# Altium PCB BugBuster_HAT.PcbDoc (part 3 of 3)
Units mm, origin at the board's own origin, x right, y up, seen from the top; angles counter-clockwise.
Board outline 110 x 80 mm, 4 copper layers (Top Layer, Mid Layer 1, Mid Layer 2, Bottom Layer), stack 1.17 mm thick; 116 components, 99 nets, 522 pads, 1540 vias.
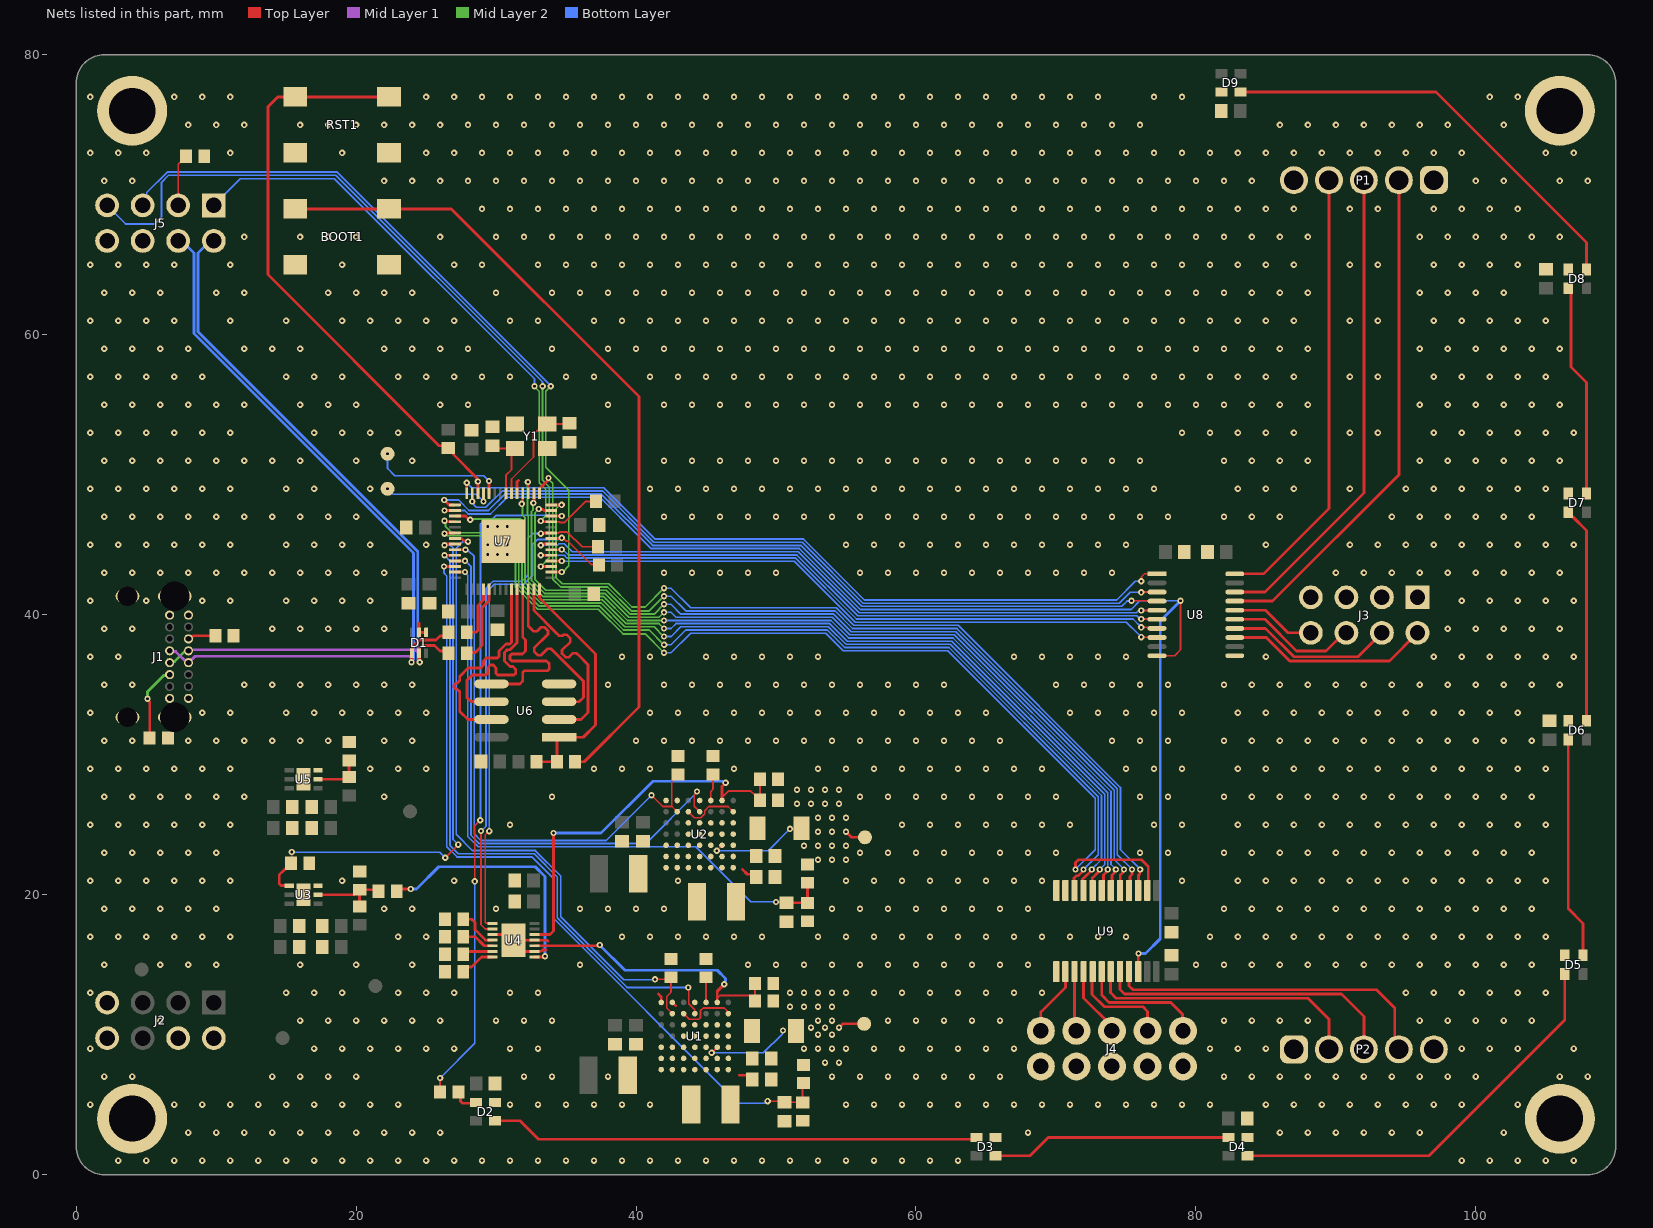
[diagram p4: the nets of this part, all layers, seen from the top]

## Via types
v1: diameter 0.45, hole 0.2, Top Layer to Bottom Layer, tented both sides, 1540 vias

## Nets (pads, with @x,y where several pads share a name; then routed paths per layer and width w, separated by ;. In a path a pad name is that pad's centre, name@x,y a point inside that pad or via, vN(x,y) a via of type N, cw(c..) or ccw(c..) an arc to the next point about the centre after c; other vN are vias at no path point) (continued)
GND: BOOT1.A1 BOOT1.A2 C1.1 C2.1 C3.1 C4.1 C5.1 C6.1 C7.1 C8.1 C9.1 C10.1 C11.1 C12.1 C13.1 C14.1 C15.1 C16.1 C17.1 C18.1 C19.1 C20.1 C21.1 C22.1 C23.1 C24.1 C25.1 C26.1 C27.1 C28.1 C29.1 C30.1 C31.1 C32.1 C33.1 C34.1 C35.1 C36.1 C37.1 C38.1 C39.1 C40.1 C41.1 C42.1 C43.1 C44.1 D1.4 D1.5 D2.2 D3.2 D4.2 D5.2 D6.2 D7.2 D8.2 D9.2 J1.1 J1.2 J1.3 J1.4 J1.A1 J1.A12 J1.B1 J1.B12 J2.7 J2.8 J3.1 J3.3 J3.5 J3.7 J4.6 J4.7 J4.8 J4.9 J4.10 J5.6 J5.8 P1.5 P2.5 pad.1 pad.2 pad.3 pad.4 R5.1 R6.1 R7.1 R8.1 R9.1 R10.1 R12.1 R14.1 R15.1 R16.2 R17.2 R18.1 R20.1 R25.2 R27.2 R33.1 R34.1 R35.1 RST1.A1 RST1.A2 U1.A1 U1.A2 U1.A3 U1.A7 U1.B1 U1.B2 U1.B3 U1.B7 U1.C1 U1.C2 U1.C3 U1.C4 U1.C5 U1.D1 U1.D2 U1.D3 U1.D4 U1.D5 U1.D7 U1.E1 U1.E2 U1.E3 U1.E4 U1.E5 U1.F1 U1.F2 U1.G1 U1.G2 U2.A1 U2.A2 U2.A3 U2.A7 U2.B1 U2.B2 U2.B3 U2.B7 U2.C1 U2.C2 U2.C3 U2.C4 U2.C5 U2.D1 U2.D2 U2.D3 U2.D4 U2.D5 U2.D7 U2.E1 U2.E2 U2.E3 U2.E4 U2.E5 U2.F1 U2.F2 U2.G1 U2.G2 U3.3 U3.7 U4.3 U4.9 U4.11 U4.15 U5.3 U5.7 U6.4 U7.19 U7.57 U8.11 U9.11 U9.12 U9.13 Y1.2 Y1.4 | length 12.2
  Top Layer w0.2: 24.5,39.4 D1.5@24.5,38.74 D1.4@25,38.74 ; U4.3@29.75,17.15 30.849,17.15 U4.15@31.249,16.75 ; U7.19@31.5,48.685 31.5,49.5 31.6,49.6 ; 33.57,16.052 33.313,16.052 33.212,15.952 32.749,15.952 U4.9@32.747,15.95 32,15.95 31.249,16.701 U4.15@31.249,16.75 ; 33.7,16.7 33.65,16.75 U4.11@32.747,16.75 U4.15@31.249,16.75 ; 41.6,12.9 41.8,12.7 U1.A7@41.8,12.3 ; U1.B7@42.6,12.3 42.831,12.069 ; 47.4,7.1 48,7.1 C7.1@48.3,6.8 ; 47.6,21.8 47.942,21.458 48.367,21.458 C11.1@48.575,21.25
  other v1: 3,1 5,1 7,1 9,1 11,1 13,1 15,1 17,1 19,1 21,1 23,1 25,1 27,1 29,1 31,1 33,1 35,1 37,1 39,1 41,1 43,1 45,1 47,1 49,1 51,1 53,1 55,1 57,1 59,1 61,1 63,1 99,1 101,1 103,1 105,1 107,1 8,3 10,3 12,3 14,3 16,3 18,3 20,3 22,3 24,3 26,3 68,3 86,3 88,3 90,3 92,3 94,3 96,3 102,3 1,5 7,5 9,5 11,5 13,5 15,5 17,5 19,5 21,5 23,5 31,5 33,5 35,5 37,5 39,5 41,5 55,5 57,5 59,5 61,5 63,5 65,5 67,5 69,5 71,5 73,5 75,5 77,5 79,5 81,5 85,5 87,5 89,5 91,5 93,5 95,5 97,5 99,5 103,5 2,7 4,7 14,7 16,7 18,7 20,7 32,7 34,7 38,7 54,7 56,7 58,7 60,7 62,7 64,7 66,7 82,7 84,7 86,7 88,7 90,7 92,7 94,7 96,7 98,7 100,7 106,7 108,7 1,9 17,9 19,9 21,9 23,9 25,9 27,9 31,9 33,9 55,9 57,9 59,9 61,9 63,9 65,9 67,9 81,9 83,9 85,9 99,9 101,9 103,9 107,9 6,11 16,11 18,11 20,11 22,11 24,11 26,11 30,11 32,11 34,11 58,11 60,11 62,11 64,11 66,11 82,11 84,11 86,11 88,11 96,11 98,11 100,11 102,11 104,11 1,13 15,13 17,13 19,13 23,13 25,13 27,13 31,13 33,13 55,13 57,13 59,13 61,13 63,13 65,13 67,13 69,13 95,13 97,13 99,13 101,13 103,13 105,13 2,15 6,15 8,15 10,15 16,15 20,15 24,15 36,15 48,15 50,15 52,15 54,15 56,15 58,15 60,15 62,15 64,15 66,15 68,15 80,15 82,15 84,15 86,15 88,15 90,15 92,15 94,15 96,15 98,15 100,15 102,15 104,15 1,17 3,17 5,17 7,17 9,17 11,17 23,17 25,17 39,17 41,17 43,17 45,17 47,17 49,17 53,17 55,17 57,17 59,17 61,17 63,17 65,17 67,17 69,17 71,17 73,17 75,17 81,17 83,17 85,17 87,17 89,17 91,17 93,17 95,17 97,17 99,17 101,17 103,17 105,17 2,19 4,19 6,19 8,19 10,19 22,19 24,19 30,19 36,19 38,19 40,19 42,19 54,19 56,19 58,19 60,19 62,19 64,19 66,19 68,19 82,19 84,19 86,19 88,19 90,19 92,19 94,19 96,19 98,19 100,19 102,19 104,19 1,21 3,21 5,21 7,21 9,21 11,21 19,21 27,21 43,21 55,21 57,21 59,21 61,21 63,21 65,21 67,21 69,21 79,21 83,21 85,21 87,21 89,21 91,21 93,21 95,21 97,21 99,21 101,21 103,21 105,21 2,23 4,23 6,23 8,23 10,23 56,23 58,23 60,23 62,23 64,23 66,23 68,23 70,23 76,23 78,23 82,23 84,23 86,23 88,23 90,23 92,23 94,23 96,23 98,23 100,23 102,23 104,23 1,25 3,25 5,25 7,25 9,25 11,25 31,25 59,25 61,25 63,25 65,25 67,25 69,25 71,25 77,25 79,25 83,25 85,25 87,25 89,25 91,25 93,25 95,25 97,25 99,25 101,25 103,25 105,25 2,27 4,27 6,27 8,27 10,27 12,27 22,27 34,27 56,27 58,27 60,27 62,27 64,27 66,27 68,27 70,27 76,27 78,27 82,27 84,27 86,27 88,27 90,27 92,27 94,27 96,27 98,27 100,27 102,27 104,27 1,29 3,29 5,29 7,29 9,29 11,29 21,29 23,29 25,29 37,29 39,29 41,29 47,29 53,29 55,29 57,29 59,29 61,29 63,29 65,29 67,29 69,29 75,29 77,29 79,29 83,29 85,29 87,29 89,29 91,29 93,29 95,29 97,29 99,29 101,29 103,29 105,29 2,31 4,31 8,31 10,31 12,31 14,31 16,31 18,31 22,31 24,31 40,31 42,31 44,31 46,31 48,31 50,31 52,31 54,31 56,31 58,31 60,31 62,31 64,31 66,31 74,31 76,31 78,31 82,31 84,31 86,31 88,31 90,31 92,31 94,31 96,31 98,31 100,31 102,31 104,31 1,33 9,33 11,33 15,33 17,33 19,33 21,33 23,33 25,33 41,33 43,33 45,33 47,33 49,33 51,33 53,33 55,33 57,33 59,33 61,33 63,33 65,33 71,33 73,33 75,33 77,33 79,33 83,33 85,33 87,33 89,33 91,33 93,33 95,33 97,33 99,33 101,33 103,33 2,35 4,35 12,35 14,35 16,35 18,35 20,35 22,35 24,35 38,35 42,35 44,35 46,35 48,35 50,35 52,35 54,35 56,35 58,35 60,35 62,35 70,35 72,35 74,35 76,35 78,35 82,35 84,35 86,35 88,35 90,35 92,35 94,35 96,35 98,35 100,35 102,35 104,35 106,35 1,37 3,37 39,37 41,37 45,37 47,37 49,37 51,37 53,37 67,37 69,37 71,37 73,37 75,37 85,37 97,37 99,37 101,37 103,37 105,37 107,37 2,39 4,39 14,39 16,39 18,39 20,39 22,39 98,39 100,39 102,39 104,39 106,39 1,41 5,41 9,41 11,41 15,41 17,41 19,41 21,41 99,41 101,41 103,41 105,41 107,41 2,43 4,43 6,43 8,43 10,43 12,43 14,43 16,43 18,43 20,43 22,43 42,43 44,43 46,43 48,43 50,43 56,43 58,43 60,43 62,43 64,43 66,43 68,43 70,43 72,43 74,43 90,43 92,43 94,43 96,43 98,43 100,43 102,43 104,43 106,43 29.4,44.3 30.1,44.3 30.8,44.3 1,45 3,45 5,45 7,45 9,45 11,45 15,45 17,45 19,45 21,45 25,45 29.4,45 30.1,45 30.8,45 55,45 57,45 59,45 61,45 63,45 65,45 67,45 69,45 71,45 73,45 75,45 85,45 91,45 93,45 95,45 97,45 99,45 101,45 103,45 105,45 107,45 29.4,46.3 30.1,46.3 30.8,46.3 2,47 4,47 6,47 8,47 10,47 12,47 14,47 16,47 18,47 20,47 42,47 44,47 46,47 48,47 50,47 52,47 54,47 56,47 58,47 60,47 62,47 64,47 66,47 68,47 70,47 72,47 74,47 76,47 78,47 82,47 84,47 86,47 94,47 96,47 98,47 100,47 102,47 104,47 1,49 3,49 5,49 7,49 9,49 11,49 15,49 17,49 21,49 41,49 43,49 45,49 47,49 49,49 51,49 53,49 55,49 57,49 59,49 61,49 63,49 65,49 67,49 69,49 71,49 73,49 75,49 77,49 83,49 85,49 87,49 91,49 95,49 97,49 99,49 101,49 103,49 105,49 2,51 4,51 6,51 8,51 10,51 12,51 14,51 16,51 20,51 24,51 38,51 42,51 44,51 46,51 48,51 50,51 52,51 54,51 56,51 58,51 60,51 62,51 64,51 66,51 68,51 70,51 72,51 74,51 76,51 82,51 84,51 86,51 88,51 96,51 98,51 100,51 102,51 104,51 106,51 1,53 3,53 5,53 7,53 9,53 11,53 17,53 19,53 21,53 23,53 79,53 81,53 83,53 85,53 87,53 91,53 93,53 97,53 99,53 101,53 103,53 105,53 107,53 2,55 4,55 6,55 8,55 10,55 12,55 16,55 18,55 20,55 26,55 28,55 38,55 42,55 44,55 46,55 48,55 50,55 52,55 54,55 56,55 58,55 60,55 62,55 64,55 66,55 68,55 70,55 72,55 74,55 76,55 78,55 80,55 82,55 84,55 86,55 88,55 96,55 98,55 100,55 102,55 104,55 106,55 1,57 3,57 5,57 7,57 9,57 15,57 17,57 19,57 23,57 25,57 27,57 29,57 31,57 35,57 37,57 41,57 43,57 45,57 47,57 49,57 51,57 53,57 55,57 57,57 59,57 61,57 63,57 65,57 67,57 69,57 71,57 73,57 75,57 77,57 79,57 81,57 83,57 85,57 87,57 91,57 93,57 97,57 99,57 101,57 103,57 105,57 2,59 4,59 6,59 8,59 12,59 14,59 16,59 22,59 24,59 26,59 28,59 34,59 38,59 40,59 42,59 44,59 46,59 48,59 50,59 52,59 54,59 56,59 58,59 60,59 62,59 64,59 66,59 68,59 70,59 72,59 74,59 76,59 78,59 80,59 82,59 84,59 86,59 88,59 96,59 98,59 100,59 102,59 104,59 106,59 1,61 3,61 5,61 7,61 11,61 15,61 19,61 21,61 23,61 25,61 27,61 31,61 33,61 37,61 39,61 41,61 43,61 45,61 47,61 49,61 51,61 53,61 55,61 57,61 59,61 61,61 63,61 65,61 67,61 69,61 71,61 73,61 75,61 77,61 79,61 81,61 83,61 85,61 87,61 91,61 93,61 97,61 99,61 101,61 103,61 105,61 2,63 4,63 6,63 10,63 12,63 18,63 20,63 22,63 24,63 30,63 34,63 36,63 38,63 40,63 42,63 44,63 46,63 48,63 50,63 52,63 54,63 56,63 58,63 60,63 62,63 64,63 66,63 68,63 70,63 72,63 74,63 76,63 78,63 80,63 82,63 84,63 86,63 88,63 96,63 98,63 100,63 102,63 1,65 3,65 5,65 7,65 11,65 19,65 27,65 29,65 33,65 35,65 37,65 39,65 41,65 43,65 45,65 47,65 49,65 51,65 53,65 55,65 57,65 59,65 61,65 63,65 65,65 67,65 69,65 71,65 73,65 75,65 77,65 79,65 81,65 83,65 85,65 87,65 91,65 93,65 97,65 99,65 101,65 103,65 12,67 16,67 18,67 20,67 26,67 30,67 32,67 34,67 36,67 38,67 40,67 42,67 44,67 46,67 48,67 50,67 52,67 54,67 56,67 58,67 60,67 62,67 64,67 66,67 68,67 70,67 72,67 74,67 76,67 78,67 80,67 82,67 84,67 86,67 88,67 96,67 98,67 100,67 102,67 104,67 106,67 29,69 31,69 33,69 35,69 37,69 39,69 41,69 43,69 45,69 47,69 49,69 51,69 53,69 55,69 57,69 59,69 61,69 63,69 65,69 67,69 69,69 71,69 73,69 75,69 77,69 79,69 81,69 83,69 85,69 87,69 91,69 93,69 97,69 99,69 101,69 103,69 2,71 4,71 22,71 24,71 26,71 28,71 30,71 32,71 34,71 36,71 38,71 40,71 42,71 44,71 46,71 48,71 50,71 52,71 54,71 56,71 58,71 60,71 62,71 64,71 66,71 68,71 70,71 72,71 74,71 76,71 78,71 80,71 82,71 84,71 100,71 102,71 106,71 108,71 1,73 3,73 5,73 11,73 19,73 25,73 27,73 29,73 31,73 33,73 35,73 37,73 39,73 41,73 43,73 45,73 47,73 49,73 51,73 53,73 55,73 57,73 59,73 61,73 63,73 65,73 67,73 69,73 71,73 73,73 75,73 77,73 79,73 81,73 83,73 85,73 87,73 89,73 91,73 93,73 95,73 97,73 99,73 105,73 107,73 8,75 10,75 12,75 16,75 18,75 20,75 22,75 24,75 26,75 28,75 30,75 32,75 34,75 36,75 38,75 40,75 42,75 44,75 46,75 48,75 50,75 52,75 54,75 56,75 58,75 60,75 62,75 64,75 66,75 68,75 70,75 72,75 74,75 76,75 86,75 88,75 90,75 92,75 94,75 96,75 98,75 102,75 1,77 7,77 9,77 11,77 25,77 27,77 29,77 31,77 33,77 35,77 37,77 39,77 41,77 43,77 45,77 47,77 49,77 51,77 53,77 55,77 57,77 59,77 61,77 63,77 65,77 67,77 69,77 71,77 73,77 77,77 79,77 101,77 103,77
ISN1: P2.1 R1.2 R3.2 R31.2 U1.F3 VADJ3.1 | length 8.4
  Top Layer w0.125: v1(45.4,8.7) U1.F3@45.8,9.1
  Top Layer w0.2: v1(54.5,10.5) 54.775,10.775 VADJ3.1@56.3,10.775
  Bottom Layer w0.125: v1(45.4,8.7) 49.1,8.7 50.438,10.038 50.438,10.238 v1(50.5,10.3)
  other v1: 53.5,8 54.5,8 52,9 53,9 54,9 53,10 54,10 52.5,10.5 53.5,10.5 53,11 54,11 51,12 52,12 53,12 54,12 51,13 52,13 53,13 54,13
ISN2: P1.1 R2.2 R4.2 R32.2 U2.F3 VADJ4.1 | length 8.8
  Top Layer w0.125: v1(45.768,23.135) 45.768,23.155 U2.F3@46.142,23.529 ; v1(51,24.7) 51.775,24.7 R2.2@51.825,24.75
  Top Layer w0.2: v1(55,24.5) 55.4,24.1 VADJ4.1@56.35,24.1
  Bottom Layer w0.125: v1(45.768,23.135) 49.435,23.135 v1(51,24.7)
  other v1: 53,22.5 54,22.5 55,22.5 52,23.5 53,23.5 54,23.5 55,23.5 53,24.5 54,24.5 53,25.5 54,25.5 55,25.5 51.5,26.5 52.5,26.5 53.5,26.5 54.5,26.5 51.5,27.5 52.5,27.5 53.5,27.5 54.5,27.5
ISP1: C7.2 C8.2 C9.2 R1.1 U1.F4 U1.F5 U1.G3 U1.G4 U1.G5
ISP2: C10.2 C11.2 C12.2 R2.1 U2.F4 U2.F5 U2.G3 U2.G4 U2.G5
LED_D: R36.2 U7.12 | length 48.6
  Top Layer w0.125: R36.2@26,5.9 v1(26,6.9) ; v1(28.475,20.95) 28.475,24.925 v1(28.862,25.312)
  Top Layer w0.2: U7.12@33.935,47.05 v1(34.691,47.05)
  Bottom Layer w0.125: v1(26,6.9) 28.475,9.375 v1(28.475,20.95) ; v1(28.862,25.312) 28.862,25.468 28.88,25.486 28.88,46.48 29.2,46.8 29.7,46.8 29.985,47.085 31.866,47.085 31.897,47.116 33.777,47.116 33.843,47.05 v1(34.691,47.05)
NetBOOT1_B1: BOOT1.B1 BOOT1.B2 R22.1 | length 58.5
  Top Layer w0.2: BOOT1.B2@15.65,69 BOOT1.B1@22.35,69 26.8,69 40.2,55.6 40.2,33.4 36.3,29.5 R22.1@35.65,29.5
NetC27_2: C27.2 U7.20 Y1.1 | length 7.8
  Top Layer w0.125: U7.20@31.1,48.685 31.1,49.7 32.669,51.269 32.669,52.894 32.938,53.162 33.188,53.162 Y1.1@33.65,53.625 35.2,53.625 C27.2@35.25,53.675
NetC33_2: C33.2 U7.21 Y1.3 | length 5.1
  Top Layer w0.125: C33.2@29.75,52.075 29.95,51.875 Y1.3@31.35,51.875 31.1,51.625 31.1,50.355 30.7,49.955 U7.21@30.7,48.685
NetC34_2: C34.2 R31.1 R33.2 U7.40 | length 57.5
  Top Layer w0.125: v1(49.4,5.25) 50.575,5.25 C34.2@50.625,5.2 ; C34.2@50.6,5.175 51.875,5.175 R33.2@51.9,5.15 51.9,6.486 R31.1@51.959,6.544
  Top Layer w0.2: v1(26.284,43.45) U7.40@27.065,43.45
  Bottom Layer w0.125: v1(26.284,43.45) 26.284,42.96 26.472,42.772 26.472,23.432 27.207,22.697 32.555,22.697 34.15,21.101 34.15,18.259 47.309,5.1 49.164,5.1 49.251,5.187 49.313,5.187 v1@49.325,5.175 ; v1(49.4,5.25) v1@49.325,5.175 ; v1@49.325,5.175 49.25,5.1 49.4,5.1 v1@49.325,5.175
NetC35_2: C35.2 R32.1 R34.2 U7.41 | length 47.4
  Top Layer w0.125: v1(50,19.475) 50.7,19.475 C35.2@50.75,19.425
  Top Layer w0.2: U7.41@27.065,43.05 27.608,43.05 v1(27.785,43.05) ; C35.2@50.75,19.425 52.225,19.425 R34.2@52.25,19.4 R32.1@52.25,20.85
  Bottom Layer w0.125: v1(27.785,43.05) 27.785,43.002 27.973,42.814 27.973,41.379 27.981,41.372 27.981,24.153 28.712,23.422 44.278,23.422 48.2,19.5 49.975,19.5 v1(50,19.475)
NetD2_1: D2.1 D3.3 | length 35
  Top Layer w0.2: D2.1@29.925,3.85 31.7,3.85 33.025,2.525 64.2,2.525 D3.3@64.325,2.65
NetD2_3: D2.3 R36.1 | length 1.9
  Top Layer w0.2: R36.1@27.3,5.9 27.458,5.742 27.458,5.242 27.6,5.1 28.525,5.1 D2.3@28.575,5.15
NetD3_1: D3.1 D4.3 | length 17.2
  Top Layer w0.2: D3.1@65.675,1.35 68.15,1.35 69.45,2.65 D4.3@82.325,2.65
NetD4_1: D4.1 D5.3 | length 30
  Top Layer w0.2: D4.1@83.675,1.35 96.65,1.35 106.35,11.05 D5.3@106.35,14.325
NetD5_1: D5.1 D6.3 | length 15.8
  Top Layer w0.2: D6.3@106.6,31.075 106.6,19 107.65,17.95 D5.1@107.65,15.675
NetD6_1: D6.1 D7.3 | length 15.5
  Top Layer w0.2: D7.3@106.6,47.325 106.6,47.225 106.825,47 106.925,47 107.9,46.025 D6.1@107.9,32.425
NetD7_1: D7.1 D8.3 | length 15.2
  Top Layer w0.2: D8.3@106.6,63.325 106.8,63.125 106.8,57.7 107.9,56.6 D7.1@107.9,48.675
NetD8_1: D8.1 D9.3 | length 31.1
  Top Layer w0.2: D9.3@83.175,77.35 97.15,77.35 107.9,66.6 D8.1@107.9,64.675
NetJ1_A5: J1.A5 R25.1 | length 2
  Top Layer w0.2: J1.A5@8.025,38.275 8.142,38.275 8.367,38.5 R25.1@9.95,38.5
NetJ1_B5: J1.B5 R27.1 | length 5.4
  Top Layer w0.2: v1(5.1,34) 5.1,33.932 5.25,33.782 R27.1@5.25,31.2
  Mid Layer 2 w0.2: v1(5.1,34) 5.1,34.5 6.258,35.658 6.608,35.658 J1.B5@6.675,35.725
NetJ3_2: J3.2 U8.13 | length 14.6
  Top Layer w0.2: U8.13@82.775,38.375 85.025,38.375 86.702,36.698 93.818,36.698 J3.2@95.83,38.71
NetJ3_4: J3.4 U8.14 | length 12.1
  Top Layer w0.2: U8.14@82.775,39.025 84.975,39.025 87,37 91.58,37 J3.4@93.29,38.71
NetJ3_6: J3.6 U8.15 | length 9.5
  Top Layer w0.2: U8.15@82.775,39.675 84.925,39.675 87.2,37.4 89.3,37.4 90.61,38.71 J3.6@90.75,38.71
NetJ3_8: J3.8 U8.16 | length 6.1
  Top Layer w0.2: U8.16@82.775,40.325 84.975,40.325 86.59,38.71 J3.8@88.21,38.71
NetJ4_1: J4.1 U9.14 | length 5
  Top Layer w0.2: J4.1@68.92,10.27 68.92,11.62 70.675,13.375 U9.14@70.675,14.5
NetJ4_2: J4.2 U9.15 | length 4.3
  Top Layer w0.2: U9.15@71.325,14.5 71.325,10.405 J4.2@71.46,10.27
NetJ4_3: J4.3 U9.16 | length 5.1
  Top Layer w0.2: U9.16@71.975,14.5 71.975,12.625 74,10.6 J4.3@74,10.27
NetJ4_4: J4.4 U9.17 | length 7.5
  Top Layer w0.2: U9.17@72.625,14.5 72.581,14.456 72.581,12.875 73.456,12 76.1,12 76.102,11.998 76.202,11.998 76.54,11.66 J4.4@76.54,10.27
NetJ4_5: J4.5 U9.18 | length 9.2
  Top Layer w0.2: U9.18@73.275,14.5 73.275,12.825 73.798,12.302 76.225,12.302 76.227,12.3 77.9,12.3 77.902,12.298 78.202,12.298 79.047,11.453 79.047,10.303 J4.5@79.08,10.27
NetJ5_1: J5.1 R30.2 U7.11 | length 45.1
  Top Layer w0.125: U7.11@33.935,46.65 33.937,46.648 34.507,46.648 34.555,46.6 34.9,46.6 36.4,48.1 R30.2@37.15,48.1
  Top Layer w0.2: v1(33.188,46.702) 33.256,46.702 33.308,46.65 U7.11@33.935,46.65
  Mid Layer 2 w0.125: v1(32.746,56.328) 32.746,56.279 33.075,55.95 33.075,49.425 33.55,48.95 33.55,47.064 v1(33.188,46.702)
  Bottom Layer w0.125: J5.1@9.685,69.105 11.73,71.15 18.45,71.15 32.746,56.854 v1(32.746,56.328)
NetJ5_3: J5.3 R35.2 | length 3.8
  Top Layer w0.125: J5.3@7.29,69.25 7.29,72.19 7.438,72.338 7.488,72.338 7.85,72.7 R35.2@7.85,72.75
NetP1_2: P1.2 U8.17 | length 36.5
  Top Layer w0.2: U8.17@82.775,40.975 85.475,40.975 94.5,50 P1.2@94.5,71.05
NetP1_3: P1.3 U8.18 | length 34.5
  Top Layer w0.2: U8.18@82.775,41.625 84.925,41.625 92,48.7 P1.3@92,71.05
NetP1_4: P1.4 U8.20 | length 32.1
  Top Layer w0.2: U8.20@82.775,42.925 84.825,42.925 89.5,47.6 P1.4@89.5,71.05
NetP2_2: P2.2 U9.19 | length 20
  Top Layer w0.2: U9.19@73.925,14.5 73.9,14.475 73.9,13 74.297,12.603 76.35,12.603 76.351,12.602 78.025,12.602 78.027,12.6 88,12.6 89.5,11.1 P2.2@89.5,8.95
NetP2_3: P2.3 U9.20 | length 21.8
  Top Layer w0.2: U9.20@74.575,14.5 74.575,13.225 74.895,12.905 76.475,12.905 76.476,12.903 78.15,12.903 78.151,12.902 90.398,12.902 92,11.3 P2.3@92,8.95
NetP2_4: P2.4 U9.21 | length 23.7
  Top Layer w0.2: U9.21@75.225,14.5 75.225,13.481 75.5,13.206 76.6,13.206 76.601,13.205 78.275,13.205 78.276,13.203 92.897,13.203 94.206,11.894 94.206,9.244 P2.4@94.5,8.95
NetR3_1: R3.1 R5.2 U1.F7 U4.10 | length 20.8
  Top Layer w0.125: 45.8,12.6 46,12.8 48.137,12.8 48.5,12.438 R3.1@48.5,12.4 R5.2@48.5,13.65
  Top Layer w0.2: U4.10@32.747,16.35 32.749,16.352 33.186,16.352 33.188,16.354 33.695,16.354 33.699,16.35 37.282,16.35 37.332,16.4 v1(37.4,16.4) ; U1.F7@45.8,12.3 45.8,13.1 v1(46.3,13.6)
  Bottom Layer w0.2: v1(37.4,16.4) 39.2,14.6 45.8,14.6 46.4,14 46.4,13.842 46.348,13.79 46.348,13.648 v1(46.3,13.6)
NetR4_1: R4.1 R6.2 U2.F7 U4.12 | length 28.6
  Top Layer w0.125: U2.F7@46.142,26.729 46.185,26.771 46.185,26.985 46.6,27.4 48.2,27.4 48.438,27.162 48.488,27.162 R4.1@48.85,26.8 ; R4.1@48.85,26.75 R4.1@48.85,26.8 ; R6.2@48.85,28.25 R4.1@48.85,26.8
  Top Layer w0.2: U4.12@32.747,17.15 33.85,17.15 34.1,17.4 v1(34.1,24.4) ; U2.F7@46.142,26.729 46.142,27.742 v1(46.4,28)
  Bottom Layer w0.2: v1(34.1,24.4) 37.5,24.4 41.2,28.1 46.158,28.1 46.21,28.048 46.352,28.048 v1(46.4,28)
NetR7_2: R7.2 U1.B6 U7.35 | length 46.8
  Top Layer w0.125: v1(41.35,13.95) 42.35,13.95 R7.2@42.5,14.1 42.5,13.025 42.2,12.725 42.2,11.9 U1.B6@42.6,11.5
  Top Layer w0.2: U7.35@27.065,45.45 27.53,45.45 27.707,45.273 27.883,45.273 27.932,45.223 v1(28,45.223)
  Bottom Layer w0.125: v1(28,45.223) 27.623,45.223 27.152,44.752 27.152,24.31 28.311,23.15 32.809,23.15 34.625,21.334 34.625,18.425 39.125,13.925 41.325,13.925 v1(41.35,13.95)
NetR8_2: R8.2 U2.B6 U7.37 | length 40.4
  Top Layer w0.125: v1(41.1,27.1) 41.9,26.3 42.571,26.3 ; U2.B6@42.942,25.929 42.571,26.3 ; R8.2@43,28.6 42.95,28.6 42.588,28.238 42.588,28.188 42.55,28.15 42.55,26.321 42.571,26.3
  Top Layer w0.2: U7.37@27.065,44.65 27.808,44.65 v1(27.812,44.647)
  Bottom Layer w0.125: v1(27.812,44.647) 27.874,44.584 28.016,44.584 28.427,44.173 28.427,41.567 28.434,41.559 28.434,24.341 28.9,23.875 37.875,23.875 v1(41.1,27.1)
NetR9_2: R9.2 U1.E7 | length 1.8
  Top Layer w0.125: U1.E7@45,12.3 R9.2@45,14.1
NetR10_2: R10.2 U2.E7 | length 1.9
  Top Layer w0.125: U2.E7@45.342,26.729 45.342,27.367 45.5,27.525 R10.2@45.5,28.6
NetR11_1: R11.1 R13.1 R15.2 U3.2 | length 5.7
  Top Layer w0.2: U3.2@17.275,20 19.85,20 20.2,20.35 R15.2@20.25,20.35 ; R11.1@20.25,19.15 R15.2@20.25,20.35 ; R13.1@21.6,20.25 21.5,20.35 R15.2@20.25,20.35
NetR12_2: R12.2 U3.4 U7.36 | length 38.7
  Top Layer w0.125: R12.2@15.35,22.25 15.4,22.3 v1(15.4,23.05) ; v1@26.35,22.625 v1(26.362,22.638) v1(27.3,23.575)
  Top Layer w0.2: U3.4@15.225,20.65 14.65,20.65 14.5,20.8 14.5,21.4 14.975,21.875 15.025,21.875 15.35,22.2 R12.2@15.35,22.25 ; v1(26.318,44.968) 26.386,44.968 26.468,45.05 U7.36@27.065,45.05
  Bottom Layer w0.125: v1(15.4,23.05) 15.411,23.039 25.961,23.039 v1@26.358,22.642 ; v1(26.318,44.968) 26.732,44.968 26.923,44.777 26.923,44.656 26.925,44.655 26.925,23.95 v1(27.3,23.575)
NetR13_2: R13.2 U4.8 | length 18.1
  Top Layer w0.2: R13.2@22.9,20.25 23.05,20.4 v1(23.9,20.4) ; U4.8@32.747,15.55 33.382,15.55 33.432,15.6 v1(33.5,15.6)
  Bottom Layer w0.2: v1(23.9,20.4) 24.3,20.4 25.9,22 32.8,22 33.5,21.3 v1(33.5,15.6)
NetR14_2: R14.2 U4.7 | length 2.5
  Top Layer w0.2: R14.2@27.65,14.5 27.65,14.512 27.975,14.837 28.237,14.837 28.95,15.55 U4.7@29.75,15.55
NetR16_1: R16.1 U4.6 | length 2.2
  Top Layer w0.2: R16.1@27.65,15.75 27.85,15.95 U4.6@29.75,15.95
NetR17_1: R17.1 U4.5 | length 2.4
  Top Layer w0.2: R17.1@27.65,17 28.5,17 29.15,16.35 U4.5@29.75,16.35
NetR18_2: R18.2 U4.4 | length 3
  Top Layer w0.2: R18.2@27.65,18.25 27.658,18.242 28.258,18.242 28.5,18 28.5,17.5 29.25,16.75 U4.4@29.75,16.75
NetR19_1: R19.1 R20.2 U5.2 | length 3.5
  Top Layer w0.2: U5.2@17.275,28.25 19.35,28.25 R19.1@19.5,28.4 R20.2@19.5,29.6
NetR21_2: R21.2 RST1.B1 RST1.B2 U7.26 | length 43.1
  Top Layer w0.2: RST1.B1@22.35,77 RST1.B2@15.65,77 14.4,77 13.7,76.3 13.7,64.3 25.926,52.074 26.427,52.074 R21.2@26.584,51.918 26.634,51.918 26.959,51.593 26.959,51.441 28.652,49.748 28.652,49.573 v1(28.7,49.525) U7.26@28.7,48.685
NetR23_2: R23.2 U7.47 | length 5.5
  Top Layer w0.2: R23.2@27.9,37.25 27.958,37.308 28.508,37.308 29,37.8 29,40.5 29.5,41 U7.47@29.5,41.815
NetR24_2: R24.2 U7.46 | length 3.9
  Top Layer w0.2: R24.2@27.9,38.75 28.555,38.75 28.698,38.893 28.698,40.672 29.1,41.073 U7.46@29.1,41.815
NetSWCLK_1: SWCLK.1 U7.24 | length 9.5
  Top Layer w0.2: U7.24@29.5,48.685 v1(29.5,49.55)
  Bottom Layer w0.125: v1(22.25,51.5) 22.25,50.45 22.761,49.939 29.111,49.939 v1(29.5,49.55)
NetSWD_1: SWD.1 U7.25 | length 7.8
  Top Layer w0.2: v1(29.1,48.099) U7.25@29.1,48.685
  Bottom Layer w0.125: v1(22.25,49) 22.635,48.615 28.584,48.615 v1(29.1,48.099)
NetU1_D6: U1.D6 U7.38 | length 46.6
  Top Layer w0.125: v1(43.735,13.375) 43.764,13.345 43.764,12.221 44.194,11.792 44.194,11.506 U1.D6@44.2,11.5
  Top Layer w0.2: v1(26.318,44.25) 26.522,44.25 U7.38@27.065,44.25
  Bottom Layer w0.125: v1(26.318,44.25) 26.698,43.87 26.698,23.526 27.301,22.923 32.715,22.923 34.377,21.262 34.377,18.353 39.355,13.375 v1(43.735,13.375)
NetU2_D6: U2.D6 U7.39 | length 40.2
  Top Layer w0.125: v1(44.35,27.375) 44.35,27.339 44.15,27.139 44.15,26.321 U2.D6@44.542,25.929
  Top Layer w0.2: U7.39@27.065,43.85 v1(27.785,43.85)
  Bottom Layer w0.125: v1(27.785,43.85) 27.812,43.85 28.2,43.462 28.2,41.473 28.207,41.466 28.207,24.247 28.806,23.648 40.7,23.648 44.35,27.298 v1(44.35,27.375)
NetU7_4: U7.4 U8.8 | length 45.6
  Top Layer w0.125: v1(76.1,38.4) 77.2,38.4 U8.8@77.225,38.375
  Top Layer w0.2: U7.4@33.935,43.85 34.677,43.85 v1(34.691,43.836)
  Bottom Layer w0.125: v1(34.691,43.836) 34.706,43.82 51.305,43.82 55.655,39.47 75.025,39.47 75.895,38.6 75.9,38.6 v1(76.1,38.4)
NetU7_5: U7.5 U8.7 | length 46.9
  Top Layer w0.125: v1(76.1,39.1) 76.536,39.1 76.57,39.066 77.183,39.066 U8.7@77.225,39.025
  Top Layer w0.2: v1(33.188,44.25) 33.392,44.25 U7.5@33.935,44.25
  Bottom Layer w0.125: v1(33.188,44.25) 34.864,44.25 35.067,44.047 51.399,44.047 55.749,39.697 75.503,39.697 v1(76.1,39.1)
NetU7_6: U7.6 U8.6 | length 45.4
  Top Layer w0.125: v1(76.1,39.7) 77.2,39.7 U8.6@77.225,39.675
  Top Layer w0.2: U7.6@33.935,44.65 34.677,44.65 v1(34.691,44.665)
  Bottom Layer w0.125: v1(34.691,44.665) 34.77,44.665 35.161,44.273 51.493,44.273 55.843,39.923 75.777,39.923 76,39.7 v1(76.1,39.7)
NetU7_7: U7.7 U8.5 | length 47
  Top Layer w0.125: v1(76.1,40.3) 77.2,40.3 U8.5@77.225,40.325
  Top Layer w0.2: v1(33.188,44.969) 33.256,44.969 33.337,45.05 U7.7@33.935,45.05
  Bottom Layer w0.125: v1(33.188,44.969) 34.383,44.969 34.493,45.079 34.863,45.079 35.442,44.5 51.586,44.5 55.936,40.15 75.75,40.15 75.9,40.3 v1(76.1,40.3)
NetU7_13: U7.13 U9.5 | length 61.8
  Top Layer w0.2: v1(33.051,47.55) 33.084,47.518 33.361,47.518 33.429,47.45 U7.13@33.935,47.45 ; U9.5@74.575,20.3 74.6,20.325 74.6,21.4 74.759,21.559 74.759,21.631 74.86,21.732 v1(74.86,21.8)
  Mid Layer 2 w0.125: v1@33.05,47.55 32.774,47.274 32.774,42.528 33.549,41.753 37.87,41.753 39.576,40.047 41.29,40.047 41.991,40.748 v1(42,40.748)
  Bottom Layer w0.125: v1(42,40.748) 42.5,40.748 43.201,40.047 54.117,40.047 55.373,38.79 62.832,38.79 74.16,27.463 74.16,22.51 74.86,21.809 v1(74.86,21.8)
NetU7_14: U7.14 U9.3 | length 61.8
  Top Layer w0.2: U7.14@33.935,47.85 34.478,47.85 v1(34.682,47.85) ; U9.3@75.875,20.3 75.9,20.325 75.9,21.4 75.986,21.486 75.986,21.772 v1(76.014,21.8)
  Mid Layer 2 w0.125: v1(34.682,47.85) 34.594,47.85 34.493,47.749 34.449,47.749 34.277,47.577 34.277,42.644 34.714,42.206 38.057,42.206 39.706,40.557 40.647,40.557 41.991,41.902 v1(42,41.902)
  Bottom Layer w0.125: v1(42,41.902) 42.5,41.902 43.902,40.5 54.305,40.5 55.561,39.244 63.02,39.244 74.613,27.651 74.613,23.211 76.014,21.809 v1(76.014,21.8)
NetU7_15: U7.15 U9.4 | length 63.9
  Top Layer w0.2: U7.15@33.1,48.685 33.1,49.005 33.693,49.598 33.693,49.725 v1(33.741,49.773) ; U9.4@75.225,20.3 75.3,20.375 75.3,21.3 75.437,21.437 v1(75.437,21.8)
  Mid Layer 2 w0.125: v1(33.741,49.773) 33.741,49.693 34.05,49.384 34.05,42.55 34.62,41.98 37.963,41.98 39.67,40.273 40.94,40.273 41.991,41.325 v1(42,41.325)
  Bottom Layer w0.125: v1(42,41.325) 42.5,41.325 43.551,40.273 54.211,40.273 55.467,39.017 62.926,39.017 74.386,27.557 74.386,22.86 75.437,21.809 v1(75.437,21.8)
NetU7_16: U7.16 U9.6 | length 61.6
  Top Layer w0.2: v1(32.664,47.978) 32.7,48.014 U7.16@32.7,48.685 ; U9.6@73.925,20.3 74,20.375 74,21.4 74.17,21.57 74.17,21.619 74.283,21.732 v1(74.283,21.8)
  Mid Layer 2 w0.125: v1(32.664,47.978) 32.637,47.951 32.637,47.488 32.527,47.378 32.527,42.455 33.455,41.527 37.776,41.527 39.482,39.82 41.64,39.82 41.991,40.171 v1(42,40.171)
  Bottom Layer w0.125: v1(42,40.171) 42.5,40.171 42.85,39.82 54.023,39.82 55.279,38.564 62.739,38.564 73.933,27.369 73.933,22.16 74.283,21.809 v1(74.283,21.8)
NetU7_17: U7.17 U9.7 | length 62.8
  Top Layer w0.2: v1(32.271,49.487) 32.3,49.458 U7.17@32.3,48.685 ; U9.7@73.275,20.3 73.4,20.425 73.4,21.4 73.582,21.582 73.582,21.608 73.706,21.732 v1(73.706,21.8)
  Mid Layer 2 w0.125: v1(32.271,49.487) 32.25,49.466 32.25,47.071 32.3,47.02 32.3,42.361 33.361,41.3 37.682,41.3 39.388,39.594 v1(42,39.594)
  Bottom Layer w0.125: v1(42,39.594) 53.929,39.594 55.186,38.337 62.645,38.337 73.706,27.275 v1(73.706,21.8)
NetU7_18: U7.18 U9.8 | length 61.7
  Top Layer w0.2: v1(31.835,47.923) 31.835,47.99 31.9,48.055 U7.18@31.9,48.685 ; U9.8@72.625,20.3 72.6,20.325 72.6,21.2 73.004,21.604 73.004,21.607 73.129,21.732 v1(73.129,21.8)
  Mid Layer 2 w0.125: v1(31.835,47.923) 31.885,47.873 31.885,47.115 32.073,46.927 32.073,42.268 33.268,41.073 37.588,41.073 39.294,39.367 41.64,39.367 41.991,39.017 v1(42,39.017)
  Bottom Layer w0.125: v1(42,39.017) 42.5,39.017 42.85,39.367 53.835,39.367 55.092,38.111 62.551,38.111 73.48,27.182 73.48,22.16 73.129,21.809 v1(73.129,21.8)
NetU7_27: U7.27 U8.3 | length 53.9
  Top Layer w0.125: v1(76.1,41.6) 76.125,41.625 U8.3@77.225,41.625
  Top Layer w0.2: v1(28.3,48.099) U7.27@28.3,48.685
  Bottom Layer w0.125: v1(28.3,48.099) 28.362,48.037 28.362,47.897 28.575,47.684 29.272,47.684 30.433,48.846 37.608,48.846 41.275,45.18 51.868,45.18 56.218,40.83 74.53,40.83 75.3,41.6 v1(76.1,41.6)
NetU7_28: U7.28 U8.1 | length 54.5
  Top Layer w0.125: v1(76.1,42.4) 76.117,42.417 76.117,42.717 76.325,42.925 U8.1@77.225,42.925
  Top Layer w0.2: U7.28@27.9,48.685 27.9,49.228 v1(27.9,49.432)
  Bottom Layer w0.125: v1(27.9,49.432) 28.259,49.073 37.702,49.073 41.369,45.406 51.962,45.406 56.312,41.056 74.336,41.056 75.68,42.4 v1(76.1,42.4)
NetU7_29: U7.29 U8.4 | length 56.1
  Top Layer w0.125: v1(75.4,41) 77.2,41 U8.4@77.225,40.975
  Top Layer w0.2: v1(26.3,48.2) 26.65,47.85 U7.29@27.065,47.85
  Bottom Layer w0.125: v1(26.3,48.2) 27.321,48.2 28.068,47.453 29.453,47.453 30.619,48.619 37.515,48.619 41.181,44.953 51.774,44.953 56.124,40.603 74.703,40.603 75.083,40.983 75.383,40.983 v1(75.4,41)
NetU7_30: U7.30 U8.10 U9.22 | length 90.9
  Top Layer w0.125: U8.10@77.225,37.075 78.475,37.075 78.9,37.5 v1(78.9,41)
  Top Layer w0.2: v1(26.318,47.45) 26.522,47.45 U7.30@27.065,47.45 ; U9.22@75.875,14.5 75.875,15.775 v1(75.9,15.8)
  Bottom Layer w0.125: v1(26.318,47.45) 27.75,47.45 28,47.2 29.6,47.2 30.793,48.393 37.421,48.393 40.198,45.615 40.198,45.602 41.073,44.727 51.68,44.727 56.03,40.377 75.377,40.377 76,41 v1(78.9,41)
  Bottom Layer w0.2: v1(75.9,15.8) 76.4,15.8 77.452,16.852 77.452,39.552 v1(78.9,41)
NetU7_31: U7.31 U9.9 | length 65.2
  Top Layer w0.2: U7.31@27.065,47.05 27.816,47.05 28.08,46.785 v1(28.148,46.785) ; U9.9@71.975,20.3 71.9,20.375 71.9,21.1 72.2,21.4 72.215,21.4 72.552,21.738 v1(72.552,21.8)
  Mid Layer 2 w0.125: v1(28.148,46.785) 28.204,46.841 31.759,46.841 31.847,46.753 31.847,42.174 33.174,40.847 37.494,40.847 39.201,39.14 41.29,39.14 41.991,38.44 v1(42,38.44)
  Bottom Layer w0.125: v1(42,38.44) 42.5,38.44 43.201,39.14 53.741,39.14 54.998,37.884 62.457,37.884 73.253,27.088 73.253,22.51 72.552,21.809 v1(72.552,21.8)
NetU7_32: U7.32 U9.10 | length 66.3
  Top Layer w0.2: v1(26.318,46.714) 26.386,46.714 26.451,46.65 U7.32@27.065,46.65 ; U9.10@71.325,20.3 71.3,20.325 71.3,21.2 71.448,21.348 71.586,21.348 71.975,21.738 v1(71.975,21.8)
  Mid Layer 2 w0.125: v1(26.318,46.714) 26.381,46.652 26.381,46.319 26.836,45.864 31.436,45.864 31.62,45.68 31.62,42.08 33.08,40.62 37.4,40.62 39.107,38.914 40.94,38.914 41.991,37.863 v1(42.005,37.863)
  Bottom Layer w0.125: v1(42.005,37.863) 42.5,37.863 43.551,38.914 53.648,38.914 54.904,37.657 62.363,37.657 73.027,26.994 73.027,22.86 71.975,21.809 v1(71.975,21.8)
NetU7_34: U7.34 U9.2 | length 71.6
  Top Layer w0.2: v1(26.317,45.797) 26.385,45.797 26.438,45.85 U7.34@27.065,45.85 ; v1(71.398,21.8) 71.398,22.298 71.6,22.5 76.1,22.5 76.6,22 76.6,20.375 U9.2@76.525,20.3
  Mid Layer 2 w0.125: v1(26.317,45.797) 26.394,45.797 26.553,45.638 31.062,45.638 31.394,45.306 31.394,41.986 32.986,40.394 37.306,40.394 39.068,38.632 40.649,38.632 41.995,37.286 v1(42,37.286)
  Bottom Layer w0.125: v1(42,37.286) 42.5,37.286 43.902,38.687 53.554,38.687 54.81,37.431 62.269,37.431 72.8,26.9 72.8,23.211 71.398,21.809 v1(71.398,21.8)
QSPI_CSN: R22.2 R26.2 U6.1 U7.56 | length 17.6
  Top Layer w0.2: R26.2@32.9,29.5 R22.2@34.35,29.5 34.35,31.1 U6.1@34.5,31.25 36.225,31.25 37.1,32.125 37.1,37.2 33.1,41.2 U7.56@33.1,41.815
QSPI_SCLK: U6.6 U7.52 | length 14.8
  Top Layer w0.2: U6.6@29.668,33.79 29.658,33.8 28.2,33.8 27.9,34.1 27.9,35.3 28.3,35.7 29.283,35.7 29.4,35.817 29.4,36.2 29.6,36.4 29.8,36.4 30,36.2 30,35.817 30.117,35.7 31.283,35.7 31.4,35.817 31.4,36.1 31.2,36.3 31,36.3 30.6,36.7 30.6,37.3 30.8,37.5 31,37.5 31.5,38 U7.52@31.5,41.815
QSPI_SD0: U6.5 U7.53 | length 14.2
  Top Layer w0.2: U6.5@29.668,35.06 31.7,35.06 31.9,35.26 31.9,35.883 32.017,36 33.683,36 33.8,36.117 33.8,36.5 33.6,36.7 31.117,36.7 31,36.817 31,37.07 31.117,37.187 31.887,37.187 32.1,37.4 32.1,38.2 31.9,38.4 U7.53@31.9,41.815
QSPI_SD1: U6.2 U7.55 | length 14.5
  Top Layer w0.2: U7.55@32.7,41.815 32.7,40.3 34.216,38.784 34.286,38.714 34.493,38.507 34.744,38.507 34.804,38.567 35.054,38.567 35.305,38.317 35.305,38.066 34.708,37.469 34.708,37.219 34.958,36.969 35.208,36.969 35.495,37.255 35.745,37.255 35.816,37.184 36.575,36.425 36.575,33.025 36.07,32.52 U6.2@34.5,32.52
QSPI_SD2: U6.3 U7.54 | length 14.1
  Top Layer w0.2: U7.54@32.3,41.815 32.3,39.2 32.371,39.129 32.678,38.822 32.928,38.822 33.214,39.109 33.465,39.109 33.715,38.858 33.715,38.608 32.722,37.615 32.722,37.364 32.972,37.114 33.222,37.114 33.679,37.571 33.929,37.571 34,37.5 36.25,35.25 36.25,34.1 35.94,33.79 U6.3@34.5,33.79
QSPI_SD3: U6.7 U7.51 | length 14.3
  Top Layer w0.2: U6.7@29.668,32.52 27.98,32.52 27.4,33.1 27.4,34.5 27.2,34.7 27.117,34.7 27,34.817 27,34.983 27.117,35.1 27.2,35.1 27.4,35.3 27.4,35.6 28,36.2 28.9,36.2 29.1,36.4 29.1,36.7 29.3,36.9 30.083,36.9 30.2,37.017 30.2,37.4 30.7,37.9 30.973,37.9 31.1,38.027 U7.51@31.1,41.815
RP_RX: J5.7 U7.3 | length 55.1
  Top Layer w0.2: v1(33.188,43.45) 33.392,43.45 U7.3@33.935,43.45
  Mid Layer 2 w0.125: v1(33.188,43.45) 33.8,44.062 33.8,49.125 33.323,49.602 v1(33.323,56.328)
  Bottom Layer w0.125: J5.7@2.21,69.25 2.21,69.24 3.525,67.925 5.6,67.925 6.1,68.425 6.1,70.901 6.597,71.398 18.553,71.398 33.323,56.628 v1(33.323,56.328)
RP_TX: J5.5 U7.2 | length 52
  Top Layer w0.2: U7.2@33.935,43.05 v1(34.691,43.05)
  Mid Layer 2 w0.125: v1(33.9,56.328) 33.9,56.319 33.55,55.968 33.55,50.55 35.2,48.9 35.2,43.5 34.75,43.05 v1(34.691,43.05)
  Bottom Layer w0.125: J5.5@4.75,69.25 5.048,69.548 5.048,70.169 6.503,71.625 18.647,71.625 33.9,56.371 v1(33.9,56.328)
SCL: R28.2 U4.2 U7.9 | length 36.8
  Top Layer w0.125: v1(28.925,24.55) 28.925,17.85 29.225,17.55 U4.2@29.75,17.55 ; U7.9@33.935,45.85 34.461,45.85 34.519,45.908 35.092,45.908 36.15,44.85 R28.2@37.275,44.85
  Top Layer w0.2: v1(33.188,45.798) 33.256,45.798 33.308,45.85 U7.9@33.935,45.85
  Bottom Layer w0.125: v1(28.925,24.55) 29.277,24.902 29.277,41.902 29.775,42.4 31.85,42.4 32.3,42.85 32.3,45.5 32.598,45.798 v1(33.188,45.798)
SDA: R29.2 U4.1 U7.8 | length 36.7
  Top Layer w0.125: v1(29.51,24.542) 29.503,24.542 29.225,24.264 29.225,18.023 29.298,17.95 U4.1@29.75,17.95 ; v1(34.691,45.494) 34.779,45.494 35.007,45.265 35.135,45.265 36.811,43.589 37.311,43.589 R29.2@37.35,43.55
  Top Layer w0.2: U7.8@33.935,45.45 34.648,45.45 v1(34.691,45.494)
  Bottom Layer w0.125: v1(29.51,24.542) 29.504,24.549 29.504,33.25 29.503,41.808 29.869,42.173 31.973,42.173 32.625,42.825 32.625,45.033 32.975,45.383 34.493,45.383 34.603,45.494 v1(34.691,45.494)
SYNC1: U1.C6 U1.G6 | length 4.2
  Top Layer w0.125: U1.C6@43.4,11.5 43.8,11.1 44.5,11.1 44.6,11.2 44.6,11.7 44.8,11.9 46.3,11.9 46.501,11.699 46.501,11.673 46.6,11.574 U1.G6@46.6,11.5
SYNC2: U2.C6 U2.G6 | length 4
  Top Layer w0.125: U2.C6@43.742,25.929 44.171,25.5 44.628,25.5 44.906,25.778 44.906,26.008 45.198,26.3 46.571,26.3 U2.G6@46.942,25.929
USB_DF2_N: D1.1 J1.A7 J1.B7 J5.4 R24.1 | length 59.6
  Top Layer w0.2: v1(23.962,36.6) 23.981,36.619 23.981,37.241 D1.1@24,37.26 24.02,37.28 24.02,37.72 24.5,38.2 25.7,38.2 25.992,38.492 26.342,38.492 R24.1@26.6,38.75
  Mid Layer 1 w0.2: J1.B7@6.675,37.425 6.728,37.372 7.106,37.372 7.903,36.575 J1.A7@8.025,36.575 8.488,37.038 23.823,37.038 23.94,36.921 23.94,36.621 v1(23.962,36.6)
  Bottom Layer w0.2: J5.4@7.29,66.71 7.539,66.71 8.409,65.84 8.409,60.091 24.099,44.401 24.099,36.805 23.962,36.668 v1(23.962,36.6)
USB_DF2_P: D1.2 J1.A6 J1.B6 J5.2 R23.1 | length 59.7
  Top Layer w0.2: v1(24.539,36.6) 24.519,36.619 24.519,37.241 D1.2@24.5,37.26 24.55,37.31 24.55,37.65 24.7,37.8 25.6,37.8 25.992,37.408 26.442,37.408 R23.1@26.6,37.25
  Mid Layer 1 w0.2: J1.A6@8.025,37.425 8.1,37.5 24.25,37.5 24.539,37.211 v1(24.539,36.6)
  Mid Layer 2 w0.2: J1.B6@6.675,36.575 6.761,36.661 7.036,36.661 7.714,37.339 7.939,37.339 J1.A6@8.025,37.425
  Bottom Layer w0.2: J5.2@9.83,66.71 9.581,66.71 8.711,65.84 8.711,60.216 24.401,44.526 24.401,36.805 24.539,36.668 v1(24.539,36.6)
VADJ1_BUCK: J2.2
VADJ2_BUCK: J2.4
pads on no net: D1.3 D1.6 D9.1 J1.A8 J1.B8 U1.C7 U1.E6 U1.F6 U1.G7 U2.C7 U2.E6 U2.F6 U2.G7 U3.5 U4.14 U5.5 U8.9 U8.12
copper on no net: | length 19
  Top Layer w0.125: 30.15,50.6 29.8,50.6 29,51.4 29,54.25 29.375,54.625 35.925,54.625 36.375,54.175 36.375,51.45 35.375,50.45 32.6,50.45

## Polygon pours and split planes (outlines as drawn)
GND on Top Layer "GND_L01_P057" (solid, remove dead copper, pour order 57): 108,0 ccw(c108,2) 110,2 110,78 ccw(c108,78) 108,80 2,80 ccw(c2,78) 0,78 0,2 ccw(c2,2) 2,0
ISP1 on Top Layer "NETC9" (solid, remove dead copper, pour order 46): 48.208,9.271 48.758,8.721 48.758,6.171 48.558,5.971 47.758,5.971 47.658,6.071 47.658,6.7 45.458,6.7 45.458,3.171 45.658,2.971 49.358,2.971 49.858,3.471 49.858,5.271 50.258,5.671 50.658,5.671 51.258,6.271 51.258,8.471 49.758,9.971 49.758,10.871 48.929,11.7 45.458,11.7 45.458,9.571 46.058,9.571 46.158,9.471 46.158,8.871 46.258,8.771 46.658,8.771 47.158,9.271
3V3_ADJ on Top Layer "NETC9" (solid, remove dead copper, pour order 49): 16.9,19.6 16.9,19.3 17.5,18.7 17.8,18.7 18.3,18.2 18.3,15.4 18.5,15.2 22.7,15.2 22.9,15.4 22.9,18.1 22.6,18.4 19.6,18.4 18.4,19.6
ISN1 on Top Layer "NETC9" (solid, remove dead copper, pour order 48): 49.158,13.171 49.158,11.471 49.758,10.871 49.758,9.971 51.258,8.471 51.258,7.071 54.758,7.071 54.958,7.271 54.958,13.171 54.758,13.371 49.358,13.371
20V_USB on Top Layer "NETC9" (solid, remove dead copper, pour order 43): 38.3,24.7 38.1,24.5 38.1,19.8 35.4,19.8 35.1,20.1 35.1,28.4 35.4,28.7 39.3,28.7 39.6,28.4 39.6,27 41.6,27 42.5,26.1 42.5,25.6 43,25.6 43.3,25.3 43.3,24.2 43.1,24 41.8,24 41.1,24.7
ISP2 on Top Layer "NETC9" (solid, remove dead copper, pour order 42): 48.75,23.5 49.1,23.15 49.1,20.6 48.9,20.4 48.1,20.4 48,20.5 48,21.2 47.8,21.4 46,21.4 45.8,21.2 45.8,17.6 46,17.4 49.7,17.4 50.2,17.9 50.2,19.7 50.6,20.1 51,20.1 51.6,20.7 51.6,22.9 50.1,24.4 50.1,25.3 49.4,26 45.8,26 45.8,24 46.4,24 46.5,23.9 46.5,23.3 46.6,23.2 47,23.2 47.3,23.5
20V_USB on Top Layer "NETC9" (solid, remove dead copper, pour order 47): 37.958,10.271 37.758,10.071 37.758,5.371 35.058,5.371 34.758,5.671 34.758,13.971 35.058,14.271 38.958,14.271 39.258,13.971 39.258,12.571 41.258,12.571 42.158,11.671 42.158,11.171 42.658,11.171 42.958,10.871 42.958,9.771 42.758,9.571 41.458,9.571 40.758,10.271
3V3 on Top Layer "NETC9" (solid, remove dead copper, pour order 56): 16.9,27.85 16.9,27.55 17.5,26.95 17.8,26.95 17.8,24.15 18.5,23.45 22.7,23.45 22.9,23.65 22.9,26.35 22.6,26.65 21.35,26.65 20.15,27.85
ISN2 on Top Layer "NETC9" (solid, remove dead copper, pour order 44): 49.5,27.6 49.5,25.9 50.1,25.3 50.1,24.4 51.6,22.9 51.6,21.5 55.1,21.5 55.3,21.7 55.3,27.6 55.1,27.8 49.7,27.8
GND on Mid Layer 2 "NETC9" (solid, remove dead copper, pour order 61): 1.31,0.041 cw(c1.31,1.311) 0.04,1.311 0.04,78.771 cw(c1.31,78.771) 1.31,80.041 108.77,80.041 cw(c108.77,78.771) 110.04,78.771 110.04,1.311 cw(c108.77,1.311) 108.77,0.041
3V3_ADJ on Mid Layer 2 "NETC9" (solid, remove dead copper, pour order 55): 17,21.55 22.55,21.55 27.99,26.99 31.9,26.99 31.9,32.3 39.7,40.1 39.7,47.4 40.8,48.5 83.3,48.5 84.8,47 84.8,29 83.9,28.1 50.1,28.1 49.2,27.2 49.2,19.7 49.6,19.3 80,19.3 80,17 45.6,17 43.5,19.1 43.5,29 43,29.5 37,29.5 34.8,27.3 34.8,18.6 30.6,14.4 18.6,14.4 17,16
3V3 on Mid Layer 2 "NETC9" (solid, remove dead copper, pour order 54): 17,21.55 22.55,21.55 28,27 31.4,27 31.9,27.5 31.9,32.4 39.8,40.3 39.8,53.7 38.4,55.1 20.4,55.1 17,51.7
20V_USB on Mid Layer 2 "NETC9" (solid, remove dead copper, pour order 52): 3.5,11 3.5,14 30.5,14 34.9,18.4 34.9,27.4 37,29.5 43,29.5 43.5,29 43.5,5.5 42.5,4.5 9,4.5 7,6.5 7,9.5 5.5,11
ISN2 on Mid Layer 2 "NETC9" (solid, remove dead copper, pour order 50): 49.2,19.7 49.6,19.3 105.6,19.3 110,23.7 110,71.7 107.5,74.2 96.4,74.2 95.6,73.4 95.6,69.7 96.6,68.7 96.6,29.5 95,27.9 49.9,27.9 49.2,27.2
ISN1 on Mid Layer 2 "NETC9" (solid, remove dead copper, pour order 51): 50.5,7 50,7.5 50,13 54,17 84.5,17 88,13.5 88,7.5 87.5,7
GND on Mid Layer 1 "NETC9" (solid, remove dead copper, pour order 60): 1.31,0.013 cw(c1.31,1.283) 0.04,1.283 0.04,78.743 cw(c1.31,78.743) 1.31,80.013 108.77,80.013 cw(c108.77,78.743) 110.04,78.743 110.04,1.283 cw(c108.77,1.283) 108.77,0.013
GND on Bottom Layer "NETC9" (solid, remove dead copper, pour order 59): 1.27,0 cw(c1.27,1.27) 0,1.27 0,78.73 cw(c1.27,78.73) 1.27,80 108.73,80 cw(c108.73,78.73) 110,78.73 110,1.27 cw(c108.73,1.27) 108.73,0

## Silkscreen, mask and mechanical layers (free items; w line width, h text height)
Top Overlay:
  drawing of 1283 lines, arcs and shapes, not listed
  text "Made with Love / by Lorenzo" at 56.925,73 h3
Bottom Overlay:
  drawing of 60 lines, arcs and shapes, not listed
  text "SWD" at 83.092,71.559 h4
  text "SWCLK" at 96.441,64.665 h4 r90
  text "SWDIO" at 93.441,64.461 h4 r90
  text "TRACE" at 90.441,64.123 h4 r90
  text "CH 1" at 106.054,62.394 h4 r270
  text "CH 2" at 106.054,45.166 h4 r270
  text "USB DAT" at 1.78,40.332 h1 r90
  text "CH 3" at 106.054,29.139 h4 r270
  text "CH 4" at 106.054,13.14 h4 r270
  text "AUX" at 94.651,10.559 h4
  text "AUX2" at 67.314,8.054 h4
Route Tool Path:
  lines w0.2: 0,1.27 ccw(c1.27,1.27) 1.27,0 39,0 108.73,0 ccw(c108.73,1.27) 110,1.27 110,78.73 ccw(c108.73,78.73) 108.73,80 1.27,80 ccw(c1.27,78.73) 0,78.73 0,1.27